# Altium PCB FIT_PM_Dual_Range_AFE.PcbDoc (part 3 of 17)
Units mm, origin at the board's own origin, x right, y up, seen from the top; angles counter-clockwise.
Board outline 259 x 114 mm, 8 copper layers (Top Layer, Mid-Layer 1, Mid-Layer 2, Layer 1, Layer 2, Mid-Layer 3, Mid-Layer 4, Bottom Layer), stack 1.616 mm thick; 963 components, 806 nets, 4757 pads, 2208 vias.
Unrouted connection lines stored in the file: 682.
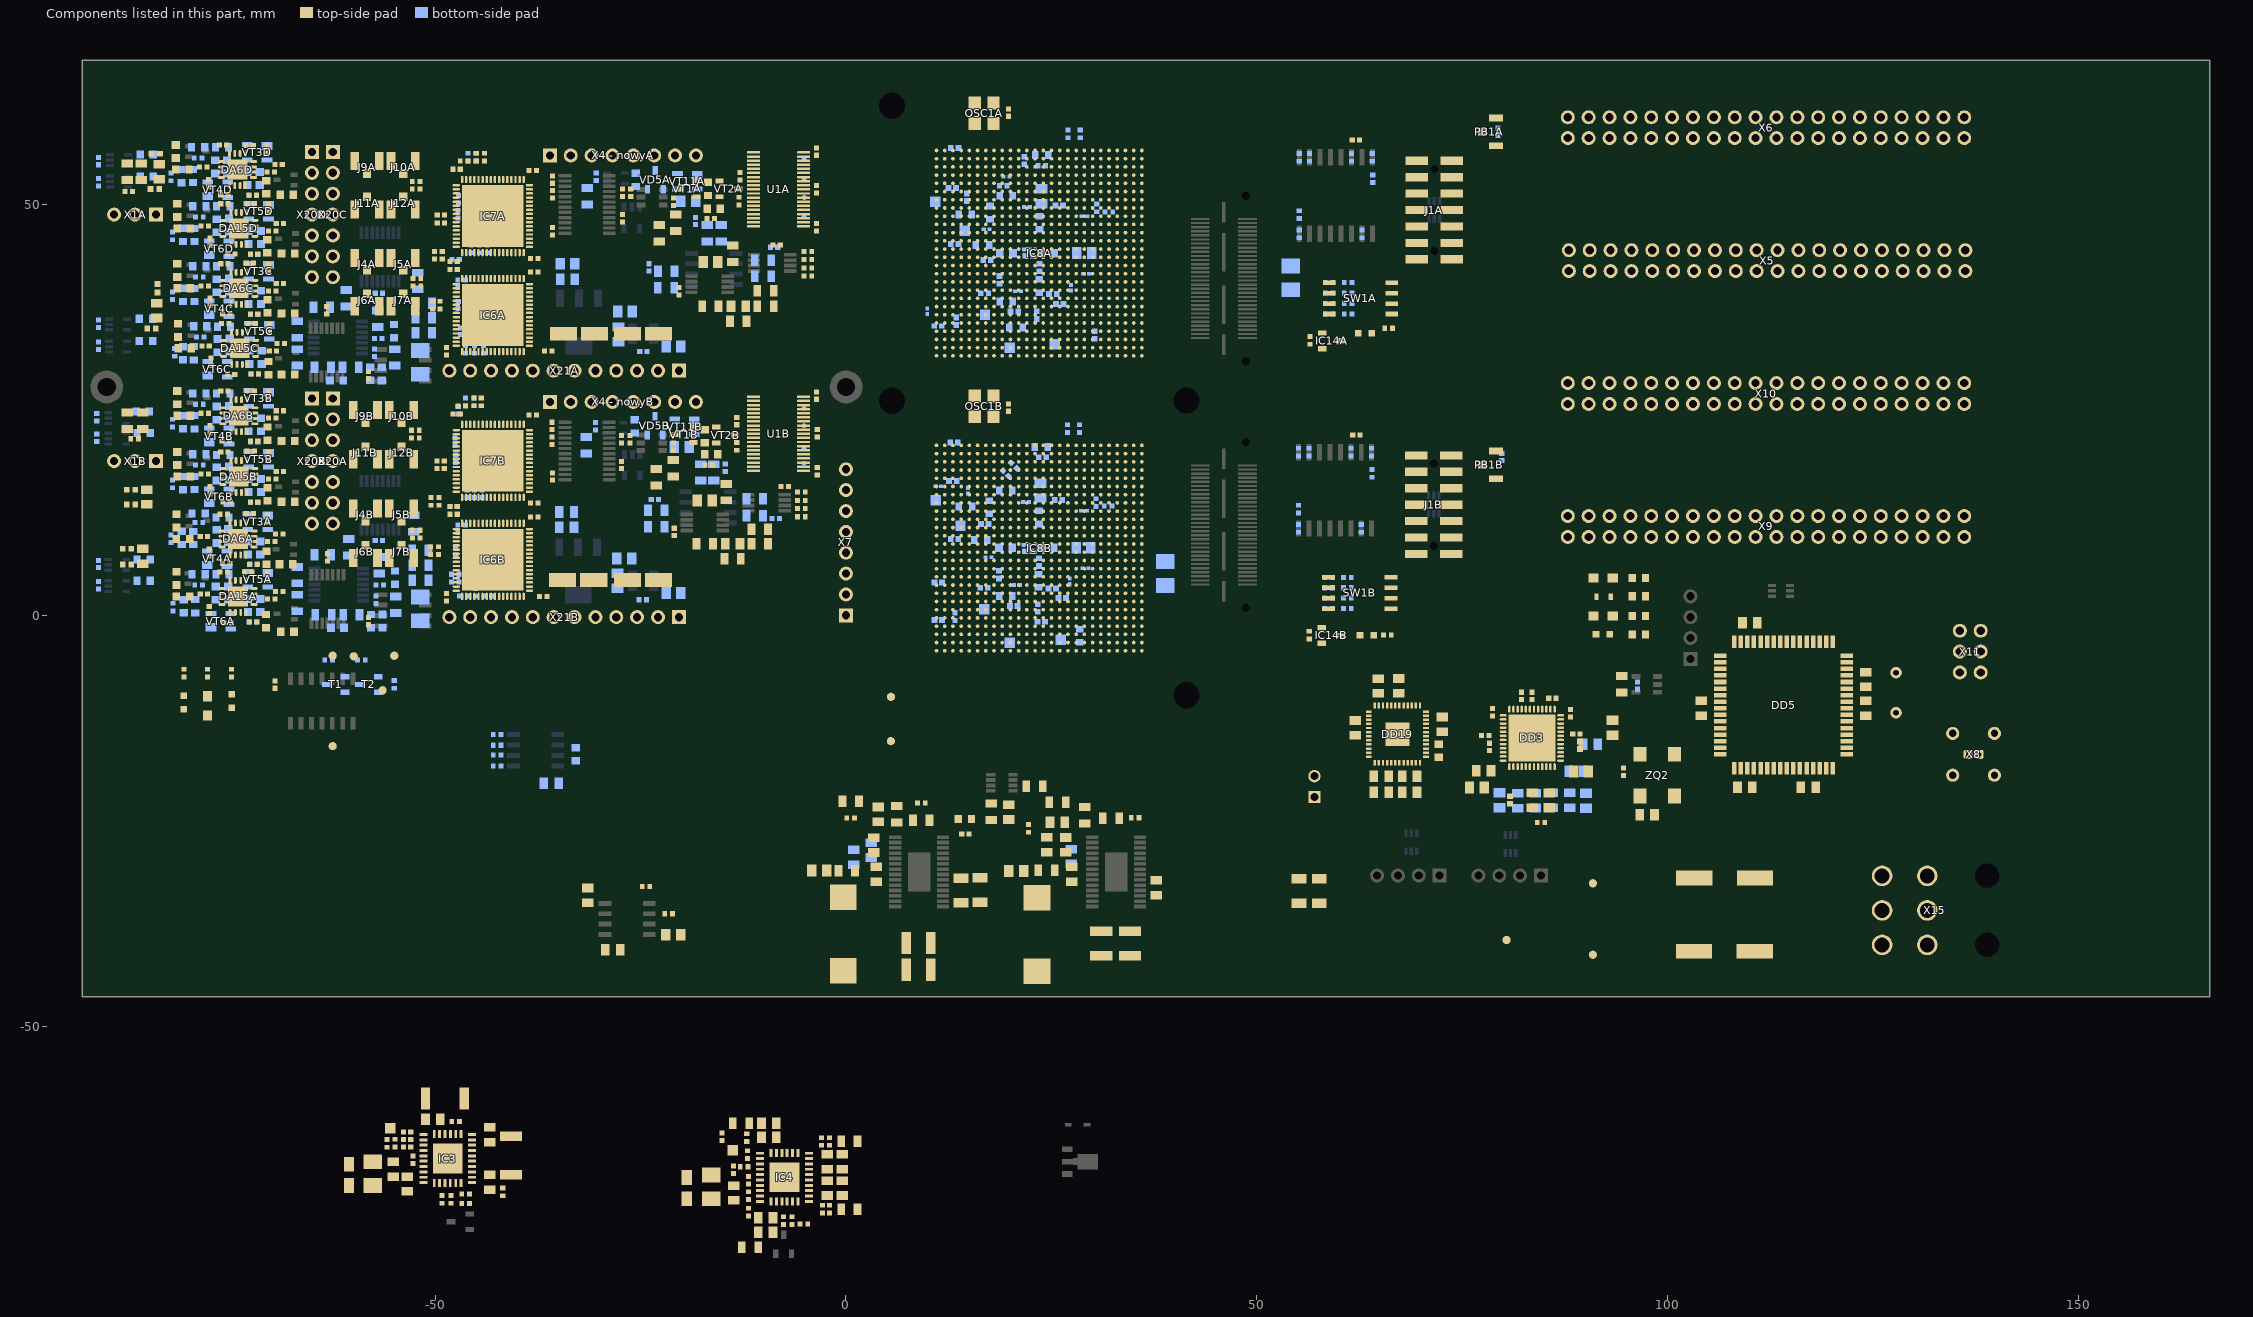
[diagram p7: the components of this part, seen from the top]

## Components (designator, comment, footprint, x,y, rotation, side; value= is the part's Value field where it differs from the comment) (continued)
R235A "Undefined" RESC1005X40N -82.15,9.325 r270 bottom (schematic designator R235)
R235B "Undefined" RESC1005X40N -82,23.4 r270 bottom (schematic designator R235)
R235C "Undefined" RESC1005X40N -82,38.9 r270 bottom (schematic designator R235)
R235D "Undefined" RESC1005X40N -82.168,53.368 r270 bottom (schematic designator R235)
R236A "210" RESC1608X55N -80.85,9.425 r270 bottom (schematic designator R236)
R236B "210" RESC1608X55N -80.7,23.5 r270 bottom (schematic designator R236)
R236C "210" RESC1608X55N -80.7,39 r270 bottom (schematic designator R236)
R236D "210" RESC1608X55N -80.868,53.468 r270 bottom (schematic designator R236)
R237A "210" RESC1608X55N -78.8,5 r0 bottom (schematic designator R237)
R237B "210" RESC1608X55N -78.7,19.6 r0 bottom (schematic designator R237)
R237C "210" RESC1608X55N -78.6,35.2 r0 bottom (schematic designator R237)
R237D "210" RESC1608X55N -78.7,49.8 r0 bottom (schematic designator R237)
R238A "Undefined" RESC1005X40N -78.8,3.7 r0 bottom (schematic designator R238)
R238B "Undefined" RESC1005X40N -78.7,18.3 r0 bottom (schematic designator R238)
R238C "Undefined" RESC1005X40N -78.6,33.9 r0 bottom (schematic designator R238)
R238D "Undefined" RESC1005X40N -78.7,48.5 r0 bottom (schematic designator R238)
R239A "210" RESC1608X55N -80.6,1.1 r270 bottom (schematic designator R239)
R239B "210" RESC1608X55N -80.7,16.1 r270 bottom (schematic designator R239)
R239C "210" RESC1608X55N -80.7,31.9 r270 bottom (schematic designator R239)
R239D "210" RESC1608X55N -80.7,46.3 r270 bottom (schematic designator R239)
R240A "Undefined" RESC1005X40N -81.9,1 r270 bottom (schematic designator R240)
R240B "Undefined" RESC1005X40N -82,16 r270 bottom (schematic designator R240)
R240C "Undefined" RESC1005X40N -81.7,32 r270 bottom (schematic designator R240)
R240D "Undefined" RESC1005X40N -82,46.2 r270 bottom (schematic designator R240)
R245A "100" RESC1608X55N -57.9,29.4 r270 bottom (schematic designator R245)
R245B "100" RESC1608X55N -57.8,-0.7 r270 bottom (schematic designator R245)
R246A "5R1" RESC2012X60N -60.3,30.2 r180 bottom (schematic designator R246)
R246B "5R1" RESC2012X60N -60.2,0.1 r180 bottom (schematic designator R246)
R247A "300" RESC2012X60N -54.9,31.4 r270 bottom (schematic designator R247)
R247B "300" RESC2012X60N -54.8,1.3 r270 bottom (schematic designator R247)
R248A "3k" RESC1608X55N -55,34.6 r270 bottom (schematic designator R248)
R248B "3k" RESC1608X55N -54.9,4.6 r270 bottom (schematic designator R248)
R300A "100" RES_VISHAY_FCHP0402 -87.52,6.2 r180 top (schematic designator R300)
R300B "100" RES_VISHAY_FCHP0402 -87.02,15.3 r180 top (schematic designator R300)
R300C "100" RES_VISHAY_FCHP0402 -83.8,39.82 r90 top (schematic designator R300)
R300D "100" RES_VISHAY_FCHP0402 -84.02,56.2 r180 top (schematic designator R300)
R400A "100" RES_VISHAY_FCHP0402 -87.52,8.1 r180 top (schematic designator R400)
R400B "100" RES_VISHAY_FCHP0402 -87.02,13.5 r180 top (schematic designator R400)
R400C "100" RES_VISHAY_FCHP0402 -84.52,34.9 r180 top (schematic designator R400)
R400D "100" RES_VISHAY_FCHP0402 -84.12,51.9 r180 top (schematic designator R400)
SW1A "Switch" SW_TYCO_1571983-4 62.619,38.586 r180 top (schematic designator SW1)
SW1B "Switch" SW_TYCO_1571983-4 62.544,2.722 r180 top (schematic designator SW1)
T1 "BSS138LT1G" SOT95P240X110-3N -62.131,-8.414 r180 bottom
T2 "BSS138LT1G" SOT95P240X110-3N -58.093,-8.414 r180 bottom
TP1 "Test Point" TPS127 -55.481,-62.414 r180 top
TP2A "Test Point" TPS127 10.891,50.356 r90 bottom (schematic designator TP2)
TP2B "Test Point" TPS127 10.919,13.995 r90 bottom (schematic designator TP2)
TP3A "Test Point" TPS127 14.447,46.825 r90 bottom (schematic designator TP3)
TP3B "Test Point" TPS127 13.942,10.922 r90 bottom (schematic designator TP3)
TP4A "Test Point" TPS127 16.919,36.586 r90 bottom (schematic designator TP4)
TP4B "Test Point" TPS127 16.844,0.722 r90 bottom (schematic designator TP4)
TP5A "Test Point" TPS127 19.919,32.586 r90 bottom (schematic designator TP5)
TP5B "Test Point" TPS127 19.919,-3.314 r90 bottom (schematic designator TP5)
TP6A "Test Point" TPS127 25.419,32.986 r90 bottom (schematic designator TP6)
TP6B "Test Point" TPS127 26.119,-2.997 r90 bottom (schematic designator TP6)
TP7A "SMD Pad" C60 -5.086,55.506 r0 bottom (schematic designator TP7)
TP7B "SMD Pad" C60 -5.1,25.2 r0 bottom (schematic designator TP7)
TP8 "Test Point" TPS127 -13.781,-65.114 r180 top
TP9A "SMD Pad" C60 -5.086,53.186 r0 bottom (schematic designator TP9)
TP9B "SMD Pad" C60 -5.1,23.091 r0 bottom (schematic designator TP9)
TP10A "SMD Pad" C60 -5.086,50.866 r0 bottom (schematic designator TP10)
TP10B "SMD Pad" C60 -5.1,20.3 r0 bottom (schematic designator TP10)
TP11A "SMD Pad" C60 -5.086,48.546 r0 bottom (schematic designator TP11)
TP11B "SMD Pad" C60 -5.1,18.5 r0 bottom (schematic designator TP11)
U1A "SN65LVDS250DBTR" DBT0038A_M -8.2,51.846 r0 top (schematic designator U1)
U1B "SN65LVDS250DBTR" DBT0038A_M -8.2,22.1 r0 top (schematic designator U1)
VD4 "Red" LED_KINGBRIGHT_KPT-2012SURCK -77.694,-11.025 r270 top
VD5A "BAS70LT1G" SOT95P240X110-3N -23.2,53 r90 bottom (schematic designator VD5)
VD5B "BAS70LT1G" SOT95P240X110-3N -23.25,23.1 r90 bottom (schematic designator VD5)
VD8 "Red" LED_KINGBRIGHT_KPT-2012SURCK 92.169,4.536 r180 top
VD13 "Red" LED_KINGBRIGHT_KPT-2012SURCK 92.169,-0.081 r180 top
VT1A "BF550" SOT95P230X110-3N -19.35,51.9 r180 top (schematic designator VT1)
VT1B "BF550" SOT95P230X110-3N -19.7,22 r180 top (schematic designator VT1)
VT2A "BF550" SOT95P230X110-3N -14.25,51.9 r0 top (schematic designator VT2)
VT2B "BF550" SOT95P230X110-3N -14.65,21.95 r0 top (schematic designator VT2)
VT3A "SST210-SOT-143-4L-CT" SOT143N -71.6,11.4 r180 bottom (schematic designator VT3)
VT3B "SST210-SOT-143-4L-CT" SOT143N -71.5,26.4 r180 bottom (schematic designator VT3)
VT3C "SST210-SOT-143-4L-CT" SOT143N -71.5,41.9 r180 bottom (schematic designator VT3)
VT3D "SST210-SOT-143-4L-CT" SOT143N -71.668,56.368 r180 bottom (schematic designator VT3)
VT4A "SST210-SOT-143-4L-CT" SOT143N -76.55,6.875 r0 bottom (schematic designator VT4)
VT4B "SST210-SOT-143-4L-CT" SOT143N -76.3,21.829 r0 bottom (schematic designator VT4)
VT4C "SST210-SOT-143-4L-CT" SOT143N -76.3,37.329 r0 bottom (schematic designator VT4)
VT4D "SST210-SOT-143-4L-CT" SOT143N -76.468,51.796 r0 bottom (schematic designator VT4)
VT5A "SST210-SOT-143-4L-CT" SOT143N -71.6,4.4 r180 bottom (schematic designator VT5)
VT5B "SST210-SOT-143-4L-CT" SOT143N -71.5,19 r180 bottom (schematic designator VT5)
VT5C "SST210-SOT-143-4L-CT" SOT143N -71.4,34.6 r180 bottom (schematic designator VT5)
VT5D "SST210-SOT-143-4L-CT" SOT143N -71.5,49.2 r180 bottom (schematic designator VT5)
VT6A "SST210-SOT-143-4L-CT" SOT143N -76.1,-0.7 r0 bottom (schematic designator VT6)
VT6B "SST210-SOT-143-4L-CT" SOT143N -76.3,14.429 r0 bottom (schematic designator VT6)
VT6C "SST210-SOT-143-4L-CT" SOT143N -76.5,29.95 r0 bottom (schematic designator VT6)
VT6D "SST210-SOT-143-4L-CT" SOT143N -76.3,44.629 r0 bottom (schematic designator VT6)
VT11A "SST211" SOT143N -19.3,52.85 r180 bottom (schematic designator VT11)
VT11B "SST211" SOT143N -19.65,22.95 r180 bottom (schematic designator VT11)
X1A "Header 3" SAMTEC_DW-03-09-L-S-470 -86.54,48.78 r180 top locked
X1B "Header 3" SAMTEC_DW-03-09-L-S-470 -86.54,18.78 r180 top locked
"X4 - nowyA" "Header 8" SAMTEC_DW-08-09-L-S-470 -27.15,55.98 r0 top locked (schematic designator "X4 - nowy")
"X4 - nowyB" "Header 8" SAMTEC_DW-08-09-L-S-470 -27.15,25.98 r0 top locked (schematic designator "X4 - nowy")
X5 "" CONNFLY_DS1013-40SSIB1-B-0 112.119,43.176 r180 top locked
X6 "" CONNFLY_DS1013-40SSIB1-B-0 111.989,59.356 r180 top locked
X7 "Header 8" SAMTEC_DW-08-09-L-S-470 0,8.89 r90 top locked
X8 "LEMO 00" LEMO_EPG.00.302.NLN 137.254,-16.914 r0 top
X9 "" CONNFLY_DS1013-40SSIB1-B-0 111.989,10.816 r180 top locked
X10 "" CONNFLY_DS1013-40SSIB1-B-0 111.989,26.996 r180 top locked
X11 "" CONNFLY_DS1013-06SSIB1-B-0 136.849,-4.414 r90 top
X15 "Mini-Fit BMI" MOLEX_15-24-9067 128.869,-35.914 r270 top
X20A "Header 7" SAMTEC_DW-07-09-L-S-470 -62.46,18.78 r270 top (schematic designator X20)
X20B "Header 7" SAMTEC_DW-07-09-L-S-470 -65,18.78 r270 top (schematic designator X20)
X20C "Header 7" SAMTEC_DW-07-09-L-S-470 -62.46,48.78 r270 top (schematic designator X20)
X20D "Header 7" SAMTEC_DW-07-09-L-S-470 -65,48.78 r270 top (schematic designator X20)
X21A "Header 12" SAMTEC_DW-12-09-L-S-470 -34.31,29.78 r180 top locked (schematic designator X21)
X21B "Header 12" SAMTEC_DW-12-09-L-S-470 -34.31,-0.22 r180 top locked (schematic designator X21)
ZQ1 "16MHz" XTAL_ABRACON_ABL 127.819,-9.414 r90 top
ZQ2 "40MHz" OSC_IQD_CFPS-73 98.768,-19.435 r180 top

## Footprints (in the part's own frame and the unit in brackets; to place one, negate y for a bottom-side part, rotate by r counter-clockwise, add the part's x,y. Pads: shape width x height; smd on the part's side, far side on the other; paste and mask are expansions set on the pad)
BGA676C100P26X26_2700X2700X350#1 [mm] "BGA, 1.00mm Pitch, Square; 676 Pin, 26 Columns X 26 Rows, 27.00mm X 27.00mm X 3.50mm H"
  round 0.45 smd: A1(-12.5,12.5) A2(-11.5,12.5) A3(-10.5,12.5) A4(-9.5,12.5) A5(-8.5,12.5) A6(-7.5,12.5) A7(-6.5,12.5) A8(-5.5,12.5) A9(-4.5,12.5) A10(-3.5,12.5) A11(-2.5,12.5) A12(-1.5,12.5) A13(-0.5,12.5) A14(0.5,12.5) A15(1.5,12.5) A16(2.5,12.5) A17(3.5,12.5) A18(4.5,12.5) A19(5.5,12.5) A20(6.5,12.5) A21(7.5,12.5) A22(8.5,12.5) A23(9.5,12.5) A24(10.5,12.5) A25(11.5,12.5) A26(12.5,12.5) AA1(-12.5,-7.5) AA2(-11.5,-7.5) AA3(-10.5,-7.5) AA4(-9.5,-7.5) AA5(-8.5,-7.5) AA6(-7.5,-7.5) AA7(-6.5,-7.5) AA8(-5.5,-7.5) AA9(-4.5,-7.5) AA10(-3.5,-7.5) AA11(-2.5,-7.5) AA12(-1.5,-7.5) AA13(-0.5,-7.5) AA14(0.5,-7.5) AA15(1.5,-7.5) AA16(2.5,-7.5) AA17(3.5,-7.5) AA18(4.5,-7.5) AA19(5.5,-7.5) AA20(6.5,-7.5) AA21(7.5,-7.5) AA22(8.5,-7.5) AA23(9.5,-7.5) AA24(10.5,-7.5) AA25(11.5,-7.5) AB1(-12.5,-8.5) AB2(-11.5,-8.5) AB3(-10.5,-8.5) AB4(-9.5,-8.5) AB5(-8.5,-8.5) AB6(-7.5,-8.5) AB7(-6.5,-8.5) AB8(-5.5,-8.5) AB9(-4.5,-8.5) AB10(-3.5,-8.5) AB11(-2.5,-8.5) AB12(-1.5,-8.5) AB13(-0.5,-8.5) AB14(0.5,-8.5) AB15(1.5,-8.5) AB16(2.5,-8.5) AB17(3.5,-8.5) AB18(4.5,-8.5) AB19(5.5,-8.5) AB20(6.5,-8.5) AB21(7.5,-8.5) AB22(8.5,-8.5) AB23(9.5,-8.5) AB24(10.5,-8.5) AB25(11.5,-8.5) AC1(-12.5,-9.5) AC2(-11.5,-9.5) AC3(-10.5,-9.5) AC4(-9.5,-9.5) AC5(-8.5,-9.5) AC6(-7.5,-9.5) AC7(-6.5,-9.5) AC8(-5.5,-9.5) AC9(-4.5,-9.5) AC10(-3.5,-9.5) AC11(-2.5,-9.5) AC12(-1.5,-9.5) AC13(-0.5,-9.5) AC14(0.5,-9.5) AC15(1.5,-9.5) AC16(2.5,-9.5) AC17(3.5,-9.5) AC18(4.5,-9.5) AC19(5.5,-9.5) AC20(6.5,-9.5) AC21(7.5,-9.5) AC22(8.5,-9.5) AC23(9.5,-9.5) AC24(10.5,-9.5) AC25(11.5,-9.5) AC26(12.5,-9.5) AD1(-12.5,-10.5) AD2(-11.5,-10.5) AD3(-10.5,-10.5) AD4(-9.5,-10.5) AD5(-8.5,-10.5) AD6(-7.5,-10.5) AD7(-6.5,-10.5) AD8(-5.5,-10.5) AD9(-4.5,-10.5) AD10(-3.5,-10.5) AD11(-2.5,-10.5) AD12(-1.5,-10.5) AD13(-0.5,-10.5) AD14(0.5,-10.5) AD15(1.5,-10.5) AD16(2.5,-10.5) AD17(3.5,-10.5) AD18(4.5,-10.5) AD19(5.5,-10.5) AD20(6.5,-10.5) AD21(7.5,-10.5) AD22(8.5,-10.5) AD23(9.5,-10.5) AD24(10.5,-10.5) AD25(11.5,-10.5) AD26(12.5,-10.5) AE1(-12.5,-11.5) AE2(-11.5,-11.5) AE3(-10.5,-11.5) AE4(-9.5,-11.5) AE5(-8.5,-11.5) AE6(-7.5,-11.5) AE7(-6.5,-11.5) AE8(-5.5,-11.5) AE9(-4.5,-11.5) AE10(-3.5,-11.5) AE11(-2.5,-11.5) AE12(-1.5,-11.5) AE13(-0.5,-11.5) AE14(0.5,-11.5) AE15(1.5,-11.5) AE16(2.5,-11.5) AE17(3.5,-11.5) AE18(4.5,-11.5) AE19(5.5,-11.5) AE20(6.5,-11.5) AE21(7.5,-11.5) AE22(8.5,-11.5) AE23(9.5,-11.5) AE24(10.5,-11.5) AE25(11.5,-11.5) AE26(12.5,-11.5) AF1(-12.5,-12.5) AF2(-11.5,-12.5) AF3(-10.5,-12.5) AF4(-9.5,-12.5) AF5(-8.5,-12.5) AF6(-7.5,-12.5) AF7(-6.5,-12.5) AF8(-5.5,-12.5) AF9(-4.5,-12.5) AF10(-3.5,-12.5) AF11(-2.5,-12.5) AF12(-1.5,-12.5) AF13(-0.5,-12.5) AF14(0.5,-12.5) AF15(1.5,-12.5) AF16(2.5,-12.5) AF17(3.5,-12.5) AF18(4.5,-12.5) AF19(5.5,-12.5) AF20(6.5,-12.5) AF21(7.5,-12.5) AF22(8.5,-12.5) AF23(9.5,-12.5) AF24(10.5,-12.5) AF25(11.5,-12.5) AF26(12.5,-12.5) B1(-12.5,11.5) B2(-11.5,11.5) B3(-10.5,11.5) B4(-9.5,11.5) B5(-8.5,11.5) B6(-7.5,11.5) B7(-6.5,11.5) B8(-5.5,11.5) B9(-4.5,11.5) B10(-3.5,11.5) B11(-2.5,11.5) B12(-1.5,11.5) B13(-0.5,11.5) B14(0.5,11.5) B15(1.5,11.5) B16(2.5,11.5) B17(3.5,11.5) B18(4.5,11.5) B19(5.5,11.5) B20(6.5,11.5) B21(7.5,11.5) B22(8.5,11.5) B23(9.5,11.5) B24(10.5,11.5) B25(11.5,11.5) B26(12.5,11.5) C1(-12.5,10.5) C2(-11.5,10.5) C3(-10.5,10.5) C4(-9.5,10.5) C5(-8.5,10.5) C6(-7.5,10.5) C7(-6.5,10.5) C8(-5.5,10.5) C9(-4.5,10.5) C10(-3.5,10.5) C11(-2.5,10.5) C12(-1.5,10.5) C13(-0.5,10.5) C14(0.5,10.5) C15(1.5,10.5) C16(2.5,10.5) C17(3.5,10.5) C18(4.5,10.5) C19(5.5,10.5) C20(6.5,10.5) C21(7.5,10.5) C22(8.5,10.5) C23(9.5,10.5) C24(10.5,10.5) C25(11.5,10.5) C26(12.5,10.5) D1(-12.5,9.5) D2(-11.5,9.5) D3(-10.5,9.5) D4(-9.5,9.5) D5(-8.5,9.5) D6(-7.5,9.5) D7(-6.5,9.5) D8(-5.5,9.5) D9(-4.5,9.5) D10(-3.5,9.5) D11(-2.5,9.5) D12(-1.5,9.5) D13(-0.5,9.5) D14(0.5,9.5) D15(1.5,9.5) D16(2.5,9.5) D17(3.5,9.5) D18(4.5,9.5) D19(5.5,9.5) D20(6.5,9.5) D21(7.5,9.5) D22(8.5,9.5) D23(9.5,9.5) D24(10.5,9.5) D25(11.5,9.5) D26(12.5,9.5) E1(-12.5,8.5) E2(-11.5,8.5) E3(-10.5,8.5) E4(-9.5,8.5) E5(-8.5,8.5) E6(-7.5,8.5) E7(-6.5,8.5) E8(-5.5,8.5) E9(-4.5,8.5) E10(-3.5,8.5) E11(-2.5,8.5) E12(-1.5,8.5) E13(-0.5,8.5) E14(0.5,8.5) E15(1.5,8.5) E16(2.5,8.5) E17(3.5,8.5) E18(4.5,8.5) E19(5.5,8.5) E20(6.5,8.5) E21(7.5,8.5) E22(8.5,8.5) E23(9.5,8.5) E24(10.5,8.5) E25(11.5,8.5) E26(12.5,8.5) F1(-12.5,7.5) F2(-11.5,7.5) F3(-10.5,7.5) F4(-9.5,7.5) F5(-8.5,7.5) F6(-7.5,7.5) F7(-6.5,7.5) F8(-5.5,7.5) F9(-4.5,7.5) F10(-3.5,7.5) F11(-2.5,7.5) F12(-1.5,7.5) F13(-0.5,7.5) F14(0.5,7.5) F15(1.5,7.5) F16(2.5,7.5) F17(3.5,7.5) F18(4.5,7.5) F19(5.5,7.5) F20(6.5,7.5) F21(7.5,7.5) F22(8.5,7.5) F23(9.5,7.5) F24(10.5,7.5) F25(11.5,7.5) F26(12.5,7.5) G1(-12.5,6.5) G2(-11.5,6.5) G3(-10.5,6.5) G4(-9.5,6.5) G5(-8.5,6.5) G6(-7.5,6.5) G7(-6.5,6.5) G8(-5.5,6.5) G9(-4.5,6.5) G10(-3.5,6.5) G11(-2.5,6.5) G12(-1.5,6.5) G13(-0.5,6.5) G14(0.5,6.5) G15(1.5,6.5) G16(2.5,6.5) G17(3.5,6.5) G18(4.5,6.5) G19(5.5,6.5) G20(6.5,6.5) G21(7.5,6.5) G22(8.5,6.5) G23(9.5,6.5) G24(10.5,6.5) G25(11.5,6.5) G26(12.5,6.5) H1(-12.5,5.5) H2(-11.5,5.5) H3(-10.5,5.5) H4(-9.5,5.5) H5(-8.5,5.5) H6(-7.5,5.5) H7(-6.5,5.5) H8(-5.5,5.5) H9(-4.5,5.5) H10(-3.5,5.5) H11(-2.5,5.5) H12(-1.5,5.5) H13(-0.5,5.5) H14(0.5,5.5) H15(1.5,5.5) H16(2.5,5.5) H17(3.5,5.5) H18(4.5,5.5) H19(5.5,5.5) H20(6.5,5.5) H21(7.5,5.5) H22(8.5,5.5) H23(9.5,5.5) H24(10.5,5.5) H25(11.5,5.5) H26(12.5,5.5) J1(-12.5,4.5) J2(-11.5,4.5) J3(-10.5,4.5) J4(-9.5,4.5) J5(-8.5,4.5) J6(-7.5,4.5) J7(-6.5,4.5) J8(-5.5,4.5) J9(-4.5,4.5) J10(-3.5,4.5) J11(-2.5,4.5) J12(-1.5,4.5) J13(-0.5,4.5) J14(0.5,4.5) J15(1.5,4.5) J16(2.5,4.5) J17(3.5,4.5) J18(4.5,4.5) J19(5.5,4.5) J20(6.5,4.5) J21(7.5,4.5) J22(8.5,4.5) J23(9.5,4.5) J24(10.5,4.5) J25(11.5,4.5) J26(12.5,4.5) K1(-12.5,3.5) K2(-11.5,3.5) K3(-10.5,3.5) K4(-9.5,3.5) K5(-8.5,3.5) K6(-7.5,3.5) K7(-6.5,3.5) K8(-5.5,3.5) K9(-4.5,3.5) K10(-3.5,3.5) K11(-2.5,3.5) K12(-1.5,3.5) K13(-0.5,3.5) K14(0.5,3.5) K15(1.5,3.5) K16(2.5,3.5) K17(3.5,3.5) K18(4.5,3.5) K19(5.5,3.5) K20(6.5,3.5) K21(7.5,3.5) K22(8.5,3.5) K23(9.5,3.5) K24(10.5,3.5) K25(11.5,3.5) K26(12.5,3.5) L1(-12.5,2.5) L2(-11.5,2.5) L3(-10.5,2.5) L4(-9.5,2.5) L5(-8.5,2.5) L6(-7.5,2.5) L7(-6.5,2.5) L8(-5.5,2.5) L9(-4.5,2.5) L10(-3.5,2.5) L11(-2.5,2.5) L12(-1.5,2.5) L13(-0.5,2.5) L14(0.5,2.5) L15(1.5,2.5) L16(2.5,2.5) L17(3.5,2.5) L18(4.5,2.5) L19(5.5,2.5) L20(6.5,2.5) L21(7.5,2.5) L22(8.5,2.5) L23(9.5,2.5) L24(10.5,2.5) L25(11.5,2.5) L26(12.5,2.5) M1(-12.5,1.5) M2(-11.5,1.5) M3(-10.5,1.5) M4(-9.5,1.5) M5(-8.5,1.5) M6(-7.5,1.5) M7(-6.5,1.5) M8(-5.5,1.5) M9(-4.5,1.5) M10(-3.5,1.5) M11(-2.5,1.5) M12(-1.5,1.5) M13(-0.5,1.5) M14(0.5,1.5) M15(1.5,1.5) M16(2.5,1.5) M17(3.5,1.5) M18(4.5,1.5) M19(5.5,1.5) M20(6.5,1.5) M21(7.5,1.5) M22(8.5,1.5) M23(9.5,1.5) M24(10.5,1.5) M25(11.5,1.5) M26(12.5,1.5) N1(-12.5,0.5) N2(-11.5,0.5) N3(-10.5,0.5) N4(-9.5,0.5) N5(-8.5,0.5) N6(-7.5,0.5) N7(-6.5,0.5) N8(-5.5,0.5) N9(-4.5,0.5) N10(-3.5,0.5) N11(-2.5,0.5) N12(-1.5,0.5) N13(-0.5,0.5) N14(0.5,0.5) N15(1.5,0.5) N16(2.5,0.5) N17(3.5,0.5) N18(4.5,0.5) N19(5.5,0.5) N20(6.5,0.5) N21(7.5,0.5) N22(8.5,0.5) N23(9.5,0.5) N24(10.5,0.5) N25(11.5,0.5) N26(12.5,0.5) P1(-12.5,-0.5) P2(-11.5,-0.5) P3(-10.5,-0.5) P4(-9.5,-0.5) P5(-8.5,-0.5) P6(-7.5,-0.5) P7(-6.5,-0.5) P8(-5.5,-0.5) P9(-4.5,-0.5) P10(-3.5,-0.5) P11(-2.5,-0.5) P12(-1.5,-0.5) P13(-0.5,-0.5) P14(0.5,-0.5) P15(1.5,-0.5) P16(2.5,-0.5) P17(3.5,-0.5) P18(4.5,-0.5) P19(5.5,-0.5) P20(6.5,-0.5) P21(7.5,-0.5) P22(8.5,-0.5) P23(9.5,-0.5) P24(10.5,-0.5) P25(11.5,-0.5) P26(12.5,-0.5) R1(-12.5,-1.5) R2(-11.5,-1.5) R3(-10.5,-1.5) R4(-9.5,-1.5) R5(-8.5,-1.5) R6(-7.5,-1.5) R7(-6.5,-1.5) R8(-5.5,-1.5) R9(-4.5,-1.5) R10(-3.5,-1.5) R11(-2.5,-1.5) R12(-1.5,-1.5) R13(-0.5,-1.5) R14(0.5,-1.5) R15(1.5,-1.5) R16(2.5,-1.5) R17(3.5,-1.5) R18(4.5,-1.5) R19(5.5,-1.5) R20(6.5,-1.5) R21(7.5,-1.5) R22(8.5,-1.5) R23(9.5,-1.5) R24(10.5,-1.5) R25(11.5,-1.5) R26(12.5,-1.5) T1(-12.5,-2.5) T2(-11.5,-2.5) T3(-10.5,-2.5) T4(-9.5,-2.5) T5(-8.5,-2.5) T6(-7.5,-2.5) T7(-6.5,-2.5) T8(-5.5,-2.5) T9(-4.5,-2.5) T10(-3.5,-2.5) T11(-2.5,-2.5) T12(-1.5,-2.5) T13(-0.5,-2.5) T14(0.5,-2.5) T15(1.5,-2.5) T16(2.5,-2.5) T17(3.5,-2.5) T18(4.5,-2.5) T19(5.5,-2.5) T20(6.5,-2.5) T21(7.5,-2.5) T22(8.5,-2.5) T23(9.5,-2.5) T24(10.5,-2.5) T25(11.5,-2.5) T26(12.5,-2.5) U1(-12.5,-3.5) U2(-11.5,-3.5) U3(-10.5,-3.5) U4(-9.5,-3.5) U5(-8.5,-3.5) U6(-7.5,-3.5) U7(-6.5,-3.5) U8(-5.5,-3.5) U9(-4.5,-3.5) U10(-3.5,-3.5) U11(-2.5,-3.5) U12(-1.5,-3.5) U13(-0.5,-3.5) U14(0.5,-3.5) U15(1.5,-3.5) U16(2.5,-3.5) U17(3.5,-3.5) U18(4.5,-3.5) U19(5.5,-3.5) U20(6.5,-3.5) U21(7.5,-3.5) U22(8.5,-3.5) U23(9.5,-3.5) U24(10.5,-3.5) U25(11.5,-3.5) U26(12.5,-3.5) V1(-12.5,-4.5) V2(-11.5,-4.5) V3(-10.5,-4.5) V4(-9.5,-4.5) V5(-8.5,-4.5) V6(-7.5,-4.5) V7(-6.5,-4.5) V8(-5.5,-4.5) V9(-4.5,-4.5) V10(-3.5,-4.5) V11(-2.5,-4.5) V12(-1.5,-4.5) V13(-0.5,-4.5) V14(0.5,-4.5) V15(1.5,-4.5) V16(2.5,-4.5) V17(3.5,-4.5) V18(4.5,-4.5) V19(5.5,-4.5) V20(6.5,-4.5) V21(7.5,-4.5) V22(8.5,-4.5) V23(9.5,-4.5) V24(10.5,-4.5) V25(11.5,-4.5) V26(12.5,-4.5) W1(-12.5,-5.5) W2(-11.5,-5.5) W3(-10.5,-5.5) W4(-9.5,-5.5) W5(-8.5,-5.5) W6(-7.5,-5.5) W7(-6.5,-5.5) W8(-5.5,-5.5) W9(-4.5,-5.5) W10(-3.5,-5.5) W11(-2.5,-5.5) W12(-1.5,-5.5) W13(-0.5,-5.5) W14(0.5,-5.5) W15(1.5,-5.5) W16(2.5,-5.5) W17(3.5,-5.5) W18(4.5,-5.5) W19(5.5,-5.5) W20(6.5,-5.5) W21(7.5,-5.5) W22(8.5,-5.5) W23(9.5,-5.5) W24(10.5,-5.5) W25(11.5,-5.5) W26(12.5,-5.5) Y1(-12.5,-6.5) Y2(-11.5,-6.5) Y3(-10.5,-6.5) Y4(-9.5,-6.5) Y5(-8.5,-6.5) Y6(-7.5,-6.5) Y7(-6.5,-6.5) Y8(-5.5,-6.5) Y9(-4.5,-6.5) Y10(-3.5,-6.5) Y11(-2.5,-6.5) Y12(-1.5,-6.5) Y13(-0.5,-6.5) Y14(0.5,-6.5) Y15(1.5,-6.5) Y16(2.5,-6.5) Y17(3.5,-6.5) Y18(4.5,-6.5) Y19(5.5,-6.5) Y20(6.5,-6.5) Y21(7.5,-6.5) Y22(8.5,-6.5) Y23(9.5,-6.5) Y24(10.5,-6.5) Y25(11.5,-6.5) Y26(12.5,-6.5)
  oval 0.45x0.4 smd: AA26(12.5,-7.5) AB26(12.5,-8.5)
  silkscreen extent -14.23,-13.5 13.5,13.5, body extent -13.5,-13.5 13.5,13.5, height 3.5
BGA676C100P26X26_2700X2700X350#2 [mm] "BGA, 1.00mm Pitch, Square; 676 Pin, 26 Columns X 26 Rows, 27.00mm X 27.00mm X 3.50mm H"
  round 0.45 smd: A1(-12.5,12.5) A2(-11.5,12.5) A3(-10.5,12.5) A4(-9.5,12.5) A5(-8.5,12.5) A6(-7.5,12.5) A7(-6.5,12.5) A8(-5.5,12.5) A9(-4.5,12.5) A10(-3.5,12.5) A11(-2.5,12.5) A12(-1.5,12.5) A13(-0.5,12.5) A14(0.5,12.5) A15(1.5,12.5) A16(2.5,12.5) A17(3.5,12.5) A18(4.5,12.5) A19(5.5,12.5) A20(6.5,12.5) A21(7.5,12.5) A22(8.5,12.5) A23(9.5,12.5) A24(10.5,12.5) A25(11.5,12.5) A26(12.5,12.5) AA1(-12.5,-7.5) AA2(-11.5,-7.5) AA3(-10.5,-7.5) AA4(-9.5,-7.5) AA5(-8.5,-7.5) AA6(-7.5,-7.5) AA7(-6.5,-7.5) AA8(-5.5,-7.5) AA9(-4.5,-7.5) AA10(-3.5,-7.5) AA11(-2.5,-7.5) AA12(-1.5,-7.5) AA13(-0.5,-7.5) AA14(0.5,-7.5) AA15(1.5,-7.5) AA16(2.5,-7.5) AA17(3.5,-7.5) AA18(4.5,-7.5) AA19(5.5,-7.5) AA20(6.5,-7.5) AA21(7.5,-7.5) AA22(8.5,-7.5) AA23(9.5,-7.5) AA24(10.5,-7.5) AA25(11.5,-7.5) AA26(12.5,-7.5) AB1(-12.5,-8.5) AB2(-11.5,-8.5) AB3(-10.5,-8.5) AB4(-9.5,-8.5) AB5(-8.5,-8.5) AB6(-7.5,-8.5) AB7(-6.5,-8.5) AB8(-5.5,-8.5) AB9(-4.5,-8.5) AB10(-3.5,-8.5) AB11(-2.5,-8.5) AB12(-1.5,-8.5) AB13(-0.5,-8.5) AB14(0.5,-8.5) AB15(1.5,-8.5) AB16(2.5,-8.5) AB17(3.5,-8.5) AB18(4.5,-8.5) AB19(5.5,-8.5) AB20(6.5,-8.5) AB21(7.5,-8.5) AB22(8.5,-8.5) AB23(9.5,-8.5) AB24(10.5,-8.5) AB25(11.5,-8.5) AB26(12.5,-8.5) AC1(-12.5,-9.5) AC2(-11.5,-9.5) AC3(-10.5,-9.5) AC4(-9.5,-9.5) AC5(-8.5,-9.5) AC6(-7.5,-9.5) AC7(-6.5,-9.5) AC8(-5.5,-9.5) AC9(-4.5,-9.5) AC10(-3.5,-9.5) AC11(-2.5,-9.5) AC12(-1.5,-9.5) AC13(-0.5,-9.5) AC14(0.5,-9.5) AC15(1.5,-9.5) AC16(2.5,-9.5) AC17(3.5,-9.5) AC18(4.5,-9.5) AC19(5.5,-9.5) AC20(6.5,-9.5) AC21(7.5,-9.5) AC22(8.5,-9.5) AC23(9.5,-9.5) AC24(10.5,-9.5) AC25(11.5,-9.5) AC26(12.5,-9.5) AD1(-12.5,-10.5) AD2(-11.5,-10.5) AD3(-10.5,-10.5) AD4(-9.5,-10.5) AD5(-8.5,-10.5) AD6(-7.5,-10.5) AD7(-6.5,-10.5) AD8(-5.5,-10.5) AD9(-4.5,-10.5) AD10(-3.5,-10.5) AD11(-2.5,-10.5) AD12(-1.5,-10.5) AD13(-0.5,-10.5) AD14(0.5,-10.5) AD15(1.5,-10.5) AD16(2.5,-10.5) AD17(3.5,-10.5) AD18(4.5,-10.5) AD19(5.5,-10.5) AD20(6.5,-10.5) AD21(7.5,-10.5) AD22(8.5,-10.5) AD23(9.5,-10.5) AD24(10.5,-10.5) AD25(11.5,-10.5) AD26(12.5,-10.5) AE1(-12.5,-11.5) AE2(-11.5,-11.5) AE3(-10.5,-11.5) AE4(-9.5,-11.5) AE5(-8.5,-11.5) AE6(-7.5,-11.5) AE7(-6.5,-11.5) AE8(-5.5,-11.5) AE9(-4.5,-11.5) AE10(-3.5,-11.5) AE11(-2.5,-11.5) AE12(-1.5,-11.5) AE13(-0.5,-11.5) AE14(0.5,-11.5) AE15(1.5,-11.5) AE16(2.5,-11.5) AE17(3.5,-11.5) AE18(4.5,-11.5) AE19(5.5,-11.5) AE20(6.5,-11.5) AE21(7.5,-11.5) AE22(8.5,-11.5) AE23(9.5,-11.5) AE24(10.5,-11.5) AE25(11.5,-11.5) AE26(12.5,-11.5) AF1(-12.5,-12.5) AF2(-11.5,-12.5) AF3(-10.5,-12.5) AF4(-9.5,-12.5) AF5(-8.5,-12.5) AF6(-7.5,-12.5) AF7(-6.5,-12.5) AF8(-5.5,-12.5) AF9(-4.5,-12.5) AF10(-3.5,-12.5) AF11(-2.5,-12.5) AF12(-1.5,-12.5) AF13(-0.5,-12.5) AF14(0.5,-12.5) AF15(1.5,-12.5) AF16(2.5,-12.5) AF17(3.5,-12.5) AF18(4.5,-12.5) AF19(5.5,-12.5) AF20(6.5,-12.5) AF21(7.5,-12.5) AF22(8.5,-12.5) AF23(9.5,-12.5) AF24(10.5,-12.5) AF25(11.5,-12.5) AF26(12.5,-12.5) B1(-12.5,11.5) B2(-11.5,11.5) B3(-10.5,11.5) B4(-9.5,11.5) B5(-8.5,11.5) B6(-7.5,11.5) B7(-6.5,11.5) B8(-5.5,11.5) B9(-4.5,11.5) B10(-3.5,11.5) B11(-2.5,11.5) B12(-1.5,11.5) B13(-0.5,11.5) B14(0.5,11.5) B15(1.5,11.5) B16(2.5,11.5) B17(3.5,11.5) B18(4.5,11.5) B19(5.5,11.5) B20(6.5,11.5) B21(7.5,11.5) B22(8.5,11.5) B23(9.5,11.5) B24(10.5,11.5) B25(11.5,11.5) B26(12.5,11.5) C1(-12.5,10.5) C2(-11.5,10.5) C3(-10.5,10.5) C4(-9.5,10.5) C5(-8.5,10.5) C6(-7.5,10.5) C7(-6.5,10.5) C8(-5.5,10.5) C9(-4.5,10.5) C10(-3.5,10.5) C11(-2.5,10.5) C12(-1.5,10.5) C13(-0.5,10.5) C14(0.5,10.5) C15(1.5,10.5) C16(2.5,10.5) C17(3.5,10.5) C18(4.5,10.5) C19(5.5,10.5) C20(6.5,10.5) C21(7.5,10.5) C22(8.5,10.5) C23(9.5,10.5) C24(10.5,10.5) C25(11.5,10.5) C26(12.5,10.5) D1(-12.5,9.5) D2(-11.5,9.5) D3(-10.5,9.5) D4(-9.5,9.5) D5(-8.5,9.5) D6(-7.5,9.5) D7(-6.5,9.5) D8(-5.5,9.5) D9(-4.5,9.5) D10(-3.5,9.5) D11(-2.5,9.5) D12(-1.5,9.5) D13(-0.5,9.5) D14(0.5,9.5) D15(1.5,9.5) D16(2.5,9.5) D17(3.5,9.5) D18(4.5,9.5) D19(5.5,9.5) D20(6.5,9.5) D21(7.5,9.5) D22(8.5,9.5) D23(9.5,9.5) D24(10.5,9.5) D25(11.5,9.5) D26(12.5,9.5) E1(-12.5,8.5) E2(-11.5,8.5) E3(-10.5,8.5) E4(-9.5,8.5) E5(-8.5,8.5) E6(-7.5,8.5) E7(-6.5,8.5) E8(-5.5,8.5) E9(-4.5,8.5) E10(-3.5,8.5) E11(-2.5,8.5) E12(-1.5,8.5) E13(-0.5,8.5) E14(0.5,8.5) E15(1.5,8.5) E16(2.5,8.5) E17(3.5,8.5) E18(4.5,8.5) E19(5.5,8.5) E20(6.5,8.5) E21(7.5,8.5) E22(8.5,8.5) E23(9.5,8.5) E24(10.5,8.5) E25(11.5,8.5) E26(12.5,8.5) F1(-12.5,7.5) F2(-11.5,7.5) F3(-10.5,7.5) F4(-9.5,7.5) F5(-8.5,7.5) F6(-7.5,7.5) F7(-6.5,7.5) F8(-5.5,7.5) F9(-4.5,7.5) F10(-3.5,7.5) F11(-2.5,7.5) F12(-1.5,7.5) F13(-0.5,7.5) F14(0.5,7.5) F15(1.5,7.5) F16(2.5,7.5) F17(3.5,7.5) F18(4.5,7.5) F19(5.5,7.5) F20(6.5,7.5) F21(7.5,7.5) F22(8.5,7.5) F23(9.5,7.5) F24(10.5,7.5) F25(11.5,7.5) F26(12.5,7.5) G1(-12.5,6.5) G2(-11.5,6.5) G3(-10.5,6.5) G4(-9.5,6.5) G5(-8.5,6.5) G6(-7.5,6.5) G7(-6.5,6.5) G8(-5.5,6.5) G9(-4.5,6.5) G10(-3.5,6.5) G11(-2.5,6.5) G12(-1.5,6.5) G13(-0.5,6.5) G14(0.5,6.5) G15(1.5,6.5) G16(2.5,6.5) G17(3.5,6.5) G18(4.5,6.5) G19(5.5,6.5) G20(6.5,6.5) G21(7.5,6.5) G22(8.5,6.5) G23(9.5,6.5) G24(10.5,6.5) G25(11.5,6.5) G26(12.5,6.5) H1(-12.5,5.5) H2(-11.5,5.5) H3(-10.5,5.5) H4(-9.5,5.5) H5(-8.5,5.5) H6(-7.5,5.5) H7(-6.5,5.5) H8(-5.5,5.5) H9(-4.5,5.5) H10(-3.5,5.5) H11(-2.5,5.5) H12(-1.5,5.5) H13(-0.5,5.5) H14(0.5,5.5) H15(1.5,5.5) H16(2.5,5.5) H17(3.5,5.5) H18(4.5,5.5) H19(5.5,5.5) H20(6.5,5.5) H21(7.5,5.5) H22(8.5,5.5) H23(9.5,5.5) H24(10.5,5.5) H25(11.5,5.5) H26(12.5,5.5) J1(-12.5,4.5) J2(-11.5,4.5) J3(-10.5,4.5) J4(-9.5,4.5) J5(-8.5,4.5) J6(-7.5,4.5) J7(-6.5,4.5) J8(-5.5,4.5) J9(-4.5,4.5) J10(-3.5,4.5) J11(-2.5,4.5) J12(-1.5,4.5) J13(-0.5,4.5) J14(0.5,4.5) J15(1.5,4.5) J16(2.5,4.5) J17(3.5,4.5) J18(4.5,4.5) J19(5.5,4.5) J20(6.5,4.5) J21(7.5,4.5) J22(8.5,4.5) J23(9.5,4.5) J24(10.5,4.5) J25(11.5,4.5) J26(12.5,4.5) K1(-12.5,3.5) K2(-11.5,3.5) K3(-10.5,3.5) K4(-9.5,3.5) K5(-8.5,3.5) K6(-7.5,3.5) K7(-6.5,3.5) K8(-5.5,3.5) K9(-4.5,3.5) K10(-3.5,3.5) K11(-2.5,3.5) K12(-1.5,3.5) K13(-0.5,3.5) K14(0.5,3.5) K15(1.5,3.5) K16(2.5,3.5) K17(3.5,3.5) K18(4.5,3.5) K19(5.5,3.5) K20(6.5,3.5) K21(7.5,3.5) K22(8.5,3.5) K23(9.5,3.5) K24(10.5,3.5) K25(11.5,3.5) K26(12.5,3.5) L1(-12.5,2.5) L2(-11.5,2.5) L3(-10.5,2.5) L4(-9.5,2.5) L5(-8.5,2.5) L6(-7.5,2.5) L7(-6.5,2.5) L8(-5.5,2.5) L9(-4.5,2.5) L10(-3.5,2.5) L11(-2.5,2.5) L12(-1.5,2.5) L13(-0.5,2.5) L14(0.5,2.5) L15(1.5,2.5) L16(2.5,2.5) L17(3.5,2.5) L18(4.5,2.5) L19(5.5,2.5) L20(6.5,2.5) L21(7.5,2.5) L22(8.5,2.5) L23(9.5,2.5) L24(10.5,2.5) L25(11.5,2.5) L26(12.5,2.5) M1(-12.5,1.5) M2(-11.5,1.5) M3(-10.5,1.5) M4(-9.5,1.5) M5(-8.5,1.5) M6(-7.5,1.5) M7(-6.5,1.5) M8(-5.5,1.5) M9(-4.5,1.5) M10(-3.5,1.5) M11(-2.5,1.5) M12(-1.5,1.5) M13(-0.5,1.5) M14(0.5,1.5) M15(1.5,1.5) M16(2.5,1.5) M17(3.5,1.5) M18(4.5,1.5) M19(5.5,1.5) M20(6.5,1.5) M21(7.5,1.5) M22(8.5,1.5) M23(9.5,1.5) M24(10.5,1.5) M25(11.5,1.5) M26(12.5,1.5) N1(-12.5,0.5) N2(-11.5,0.5) N3(-10.5,0.5) N4(-9.5,0.5) N5(-8.5,0.5) N6(-7.5,0.5) N7(-6.5,0.5) N8(-5.5,0.5) N9(-4.5,0.5) N10(-3.5,0.5) N11(-2.5,0.5) N12(-1.5,0.5) N13(-0.5,0.5) N14(0.5,0.5) N15(1.5,0.5) N16(2.5,0.5) N17(3.5,0.5) N18(4.5,0.5) N19(5.5,0.5) N20(6.5,0.5) N21(7.5,0.5) N22(8.5,0.5) N23(9.5,0.5) N24(10.5,0.5) N25(11.5,0.5) N26(12.5,0.5) P1(-12.5,-0.5) P2(-11.5,-0.5) P3(-10.5,-0.5) P4(-9.5,-0.5) P5(-8.5,-0.5) P6(-7.5,-0.5) P7(-6.5,-0.5) P8(-5.5,-0.5) P9(-4.5,-0.5) P10(-3.5,-0.5) P11(-2.5,-0.5) P12(-1.5,-0.5) P13(-0.5,-0.5) P14(0.5,-0.5) P15(1.5,-0.5) P16(2.5,-0.5) P17(3.5,-0.5) P18(4.5,-0.5) P19(5.5,-0.5) P20(6.5,-0.5) P21(7.5,-0.5) P22(8.5,-0.5) P23(9.5,-0.5) P24(10.5,-0.5) P25(11.5,-0.5) P26(12.5,-0.5) R1(-12.5,-1.5) R2(-11.5,-1.5) R3(-10.5,-1.5) R4(-9.5,-1.5) R5(-8.5,-1.5) R6(-7.5,-1.5) R7(-6.5,-1.5) R8(-5.5,-1.5) R9(-4.5,-1.5) R10(-3.5,-1.5) R11(-2.5,-1.5) R12(-1.5,-1.5) R13(-0.5,-1.5) R14(0.5,-1.5) R15(1.5,-1.5) R16(2.5,-1.5) R17(3.5,-1.5) R18(4.5,-1.5) R19(5.5,-1.5) R20(6.5,-1.5) R21(7.5,-1.5) R22(8.5,-1.5) R23(9.5,-1.5) R24(10.5,-1.5) R25(11.5,-1.5) R26(12.5,-1.5) T1(-12.5,-2.5) T2(-11.5,-2.5) T3(-10.5,-2.5) T4(-9.5,-2.5) T5(-8.5,-2.5) T6(-7.5,-2.5) T7(-6.5,-2.5) T8(-5.5,-2.5) T9(-4.5,-2.5) T10(-3.5,-2.5) T11(-2.5,-2.5) T12(-1.5,-2.5) T13(-0.5,-2.5) T14(0.5,-2.5) T15(1.5,-2.5) T16(2.5,-2.5) T17(3.5,-2.5) T18(4.5,-2.5) T19(5.5,-2.5) T20(6.5,-2.5) T21(7.5,-2.5) T22(8.5,-2.5) T23(9.5,-2.5) T24(10.5,-2.5) T25(11.5,-2.5) T26(12.5,-2.5) U1(-12.5,-3.5) U2(-11.5,-3.5) U3(-10.5,-3.5) U4(-9.5,-3.5) U5(-8.5,-3.5) U6(-7.5,-3.5) U7(-6.5,-3.5) U8(-5.5,-3.5) U9(-4.5,-3.5) U10(-3.5,-3.5) U11(-2.5,-3.5) U12(-1.5,-3.5) U13(-0.5,-3.5) U14(0.5,-3.5) U15(1.5,-3.5) U16(2.5,-3.5) U17(3.5,-3.5) U18(4.5,-3.5) U19(5.5,-3.5) U20(6.5,-3.5) U21(7.5,-3.5) U22(8.5,-3.5) U23(9.5,-3.5) U24(10.5,-3.5) U25(11.5,-3.5) U26(12.5,-3.5) V1(-12.5,-4.5) V2(-11.5,-4.5) V3(-10.5,-4.5) V4(-9.5,-4.5) V5(-8.5,-4.5) V6(-7.5,-4.5) V7(-6.5,-4.5) V8(-5.5,-4.5) V9(-4.5,-4.5) V10(-3.5,-4.5) V11(-2.5,-4.5) V12(-1.5,-4.5) V13(-0.5,-4.5) V14(0.5,-4.5) V15(1.5,-4.5) V16(2.5,-4.5) V17(3.5,-4.5) V18(4.5,-4.5) V19(5.5,-4.5) V20(6.5,-4.5) V21(7.5,-4.5) V22(8.5,-4.5) V23(9.5,-4.5) V24(10.5,-4.5) V25(11.5,-4.5) V26(12.5,-4.5) W1(-12.5,-5.5) W2(-11.5,-5.5) W3(-10.5,-5.5) W4(-9.5,-5.5) W5(-8.5,-5.5) W6(-7.5,-5.5) W7(-6.5,-5.5) W8(-5.5,-5.5) W9(-4.5,-5.5) W10(-3.5,-5.5) W11(-2.5,-5.5) W12(-1.5,-5.5) W13(-0.5,-5.5) W14(0.5,-5.5) W15(1.5,-5.5) W16(2.5,-5.5) W17(3.5,-5.5) W18(4.5,-5.5) W19(5.5,-5.5) W20(6.5,-5.5) W21(7.5,-5.5) W22(8.5,-5.5) W23(9.5,-5.5) W24(10.5,-5.5) W25(11.5,-5.5) W26(12.5,-5.5) Y1(-12.5,-6.5) Y2(-11.5,-6.5) Y3(-10.5,-6.5) Y4(-9.5,-6.5) Y5(-8.5,-6.5) Y6(-7.5,-6.5) Y7(-6.5,-6.5) Y8(-5.5,-6.5) Y9(-4.5,-6.5) Y10(-3.5,-6.5) Y11(-2.5,-6.5) Y12(-1.5,-6.5) Y13(-0.5,-6.5) Y14(0.5,-6.5) Y15(1.5,-6.5) Y16(2.5,-6.5) Y17(3.5,-6.5) Y18(4.5,-6.5) Y19(5.5,-6.5) Y20(6.5,-6.5) Y21(7.5,-6.5) Y22(8.5,-6.5) Y23(9.5,-6.5) Y24(10.5,-6.5) Y25(11.5,-6.5) Y26(12.5,-6.5)
  silkscreen extent -14.23,-13.5 13.5,13.5, body extent -13.5,-13.5 13.5,13.5, height 3.5
C60 [mm] "0.6mm Diameter SMD Pad"
  round 0.6 smd paste-1: 1(0,0)
  silkscreen extent -0.65,-0.65 0.65,0.65
C100 [mm] "1mm Diameter SMD Pad"
  round 1 smd paste-0.5: 1(0,0)
CAPAE530X610N [mm] "Capacitor, Aluminium Electrolytric, 5.3mm L X 5.3mm W X 6.1mm H, IPC Medium Density"
  rect 3.3x1.65 smd: 1(-1.9,0) 2(1.9,0)
  silkscreen extent -3.4,-2.76 2.76,2.76, body extent -3.05,-2.76 3.05,2.76, height 6.3
CAPAE830X1020N [mm] "Capacitor, Aluminium Electrolytric, 8.3mm L X 8.3mm W X 10.2mm H, IPC Medium Density"
  rect 4.4x1.8 smd: 1(-3.7,0) 2(3.7,0)
  silkscreen extent -4.9,-4.15 4.15,4.15, body extent -4.75,-4.25 5.25,4.25, height 10.2
CAPC0603X33N [mm] "Chip Capacitor, Body 0.6x0.30mm, IPC Medium Density"
  rect 0.5x0.45 smd paste-0.025 mask-0.025: 1(-0.35,0) 2(0.35,0)
  body extent -0.31,-0.16 0.32,0.17, height 0.33
CAPC1005X55N [mm] "Capacitor, Non-Polarized, Chip; 1.00mm L X 0.50mm W X 0.70mm H, IPC Medium Density"
  rect 0.62x0.62 smd: 1(-0.45,0) 2(0.45,0)
  body extent -0.52,-0.27 0.53,0.28, height 0.55
CAPC1005X61N [mm] "Capacitor, Non-Polarized, Chip; 1.02mm L X 0.51mm W X 0.61mm H, IPC Medium Density"
  rect 0.65x0.65 smd: 1(-0.46,0) 2(0.46,0)
  body extent -0.56,-0.3 0.56,0.31, height 0.61
CAPC1005X70N [mm] "Capacitor, Non-Polarized, Chip; 1.00mm L X 0.50mm W X 0.70mm H, IPC Medium Density"
  rect 0.71x0.72 smd: 1(-0.46,0) 2(0.46,0)
  body extent -0.6,-0.35 0.6,0.35, height 0.7
CAPC1608X87N [mm] "Chip Capacitor, Body 1.6x0.8mm IPC Medium Density"
  rect 0.95x1 smd: 1(-0.8,0) 2(0.8,0)
  body extent -0.87,-0.47 0.88,0.48, height 0.87
CAPC1608X100N [mm] "Capacitor, non-Polarized, Chip; 1.60mm L X 0.80mm W X 1.00mm H, IPC Medium Density"
  rect 0.8x0.95 smd: 1(-0.8,0) 2(0.8,0)
  silkscreen extent 0,-0.3 0,0.3, body extent -0.85,-0.45 0.85,0.45, height 1
CAPC2012X88N [mm] "Chip Capacitor, Body 2.0x1.25mm, IPC Medium Density"
  rect 1.15x1.45 smd: 1(-0.9,0) 2(0.9,0)
  silkscreen extent 0,-0.57 0,0.57, body extent -1.05,-0.67 1.05,0.68, height 0.9
CAPC2012X135N [mm] "Chip Capacitor, Body 2.0x1.25mm, IPC Medium Density"
  rect 1.05x1.4 smd: 1(-0.9,0) 2(0.9,0)
  silkscreen extent 0,-0.57 0,0.57, body extent -1.05,-0.67 1.05,0.68, height 1.25
CAPC2012X140N [mm] "Chip Capacitor, Body 2.0x1.25mm, IPC Medium Density"
  rect 1.15x1.45 smd: 1(-0.9,0) 2(0.9,0)
  silkscreen extent 0,-0.58 0,0.58, body extent -1.05,-0.67 1.05,0.68, height 1.3
CAPC2013X100N [mm] "Capacitor, Non-Polarized, Chip; 2.00mm L X 1.25mm W X 0.9mm H, IPC Medium Density"
  rect 1.15x1.45 smd: 1(-0.9,0) 2(0.9,0)
  silkscreen extent 0,-0.63 0,0.63, body extent -1.1,-0.72 1.1,0.73, height 1
CAPC2013X145N [mm] "Capacitor, Non-Polarized, Chip; 2.00mm L X 1.25mm W X 1.45mm H, IPC Medium Density"
  rect 1.15x1.45 smd: 1(-0.9,0) 2(0.9,0)
  silkscreen extent 0,-0.63 0,0.63, body extent -1.1,-0.72 1.1,0.73, height 1.45
CAPC3216X180N [mm] "Chip Capacitor, Body 3.2x1.6mm, IPC Medium Density"
  rect 1.15x1.8 smd: 1(-1.5,0) 2(1.5,0)
  silkscreen extent -0.55,-0.8 0.55,0.8, body extent -1.7,-0.9 1.7,0.9, height 1.8
CAPC3225X270N [mm] "Chip Capacitor, Body 3.2x2.5mm, IPC Medium Density"
  rect 1.15x2.7 smd: 1(-1.5,0) 2(1.5,0)
  silkscreen extent -0.55,-1.25 0.55,1.25, body extent -1.7,-1.35 1.7,1.35, height 2.7
CAPMP3216X180N [mm] "Capacitor, Polarized, Molded  Body 3.2x1.6mm, IPC Medium Density"
  rect 1.8x1.25 smd: 1(-1.3,0) 2(1.3,0)
  silkscreen extent -2.4,-0.7 0,1.25, body extent -1.7,-0.9 1.7,0.9, height 1.6
CAPMP3528X120N [mm] "Capacitor, Polarized, Molded  Body 3.5x2.8mm, IPC Medium Density"
  rect 1.8x2.25 smd: 1(-1.45,0) 2(1.45,0)
  silkscreen extent -2.52,-1.5 1.85,1.72, body extent -1.85,-1.5 1.85,1.5, height 1.2
CAPMP3528X210N [mm] "Capacitor, Polarized, Molded  Body 3.5x2.8mm, IPC Medium Density"
  rect 1.8x2.25 smd: 1(-1.45,0) 2(1.45,0)
  silkscreen extent -2.52,-1.5 1.85,1.73, body extent -1.85,-1.5 1.85,1.5, height 2.1
CONNFLY_DS1013-06SSIB1-B-0 [mm] "Part Description / 6 Contacts, 2.54mm Box Header V/T,R/A & SMT Type"
  round 1.7 hole 1: 1(-2.54,-1.27) 2(-2.54,1.27) 3(0,-1.27) 4(0,1.27) 5(2.54,-1.27) 6(2.54,1.27)
  silkscreen extent -7.61,-4.55 7.61,4.55, body extent -7.61,-4.55 7.61,4.55, height 9.1
CONNFLY_DS1013-40SSIB1-B-0 [mm] "40 Contacts, 2.54mm Box Header V/T,R/A & SMT Type"
  round 1.7 hole 1: 1(-24.13,-1.27) 2(-24.13,1.27) 3(-21.59,-1.27) 4(-21.59,1.27) 5(-19.05,-1.27) 6(-19.05,1.27) 7(-16.51,-1.27) 8(-16.51,1.27) 9(-13.97,-1.27) 10(-13.97,1.27) 11(-11.43,-1.27) 12(-11.43,1.27) 13(-8.89,-1.27) 14(-8.89,1.27) 15(-6.35,-1.27) 16(-6.35,1.27) 17(-3.81,-1.27) 18(-3.81,1.27) 19(-1.27,-1.27) 20(-1.27,1.27) 21(1.27,-1.27) 22(1.27,1.27) 23(3.81,-1.27) 24(3.81,1.27) 25(6.35,-1.27) 26(6.35,1.27) 27(8.89,-1.27) 28(8.89,1.27) 29(11.43,-1.27) 30(11.43,1.27) 31(13.97,-1.27) 32(13.97,1.27) 33(16.51,-1.27) 34(16.51,1.27) 35(19.05,-1.27) 36(19.05,1.27) 37(21.59,-1.27) 38(21.59,1.27) 39(24.13,-1.27) 40(24.13,1.27)
  silkscreen extent -29.2,-4.55 29.2,4.55, body extent -29.2,-4.55 29.2,4.55, height 9.1
DBT0038A_M [mm] "SOP, 38-Leads, Body 9.8x4.5mm, Pitch 0.5mm, IPC Low Density"
  rrect33% 1.6x0.3 smd: 1(-3.05,4.5) 2(-3.05,4) 3(-3.05,3.5) 4(-3.05,3) 5(-3.05,2.5) 6(-3.05,2) 7(-3.05,1.5) 8(-3.05,1) 9(-3.05,0.5) 10(-3.05,0) 11(-3.05,-0.5) 12(-3.05,-1) 13(-3.05,-1.5) 14(-3.05,-2) 15(-3.05,-2.5) 16(-3.05,-3) 17(-3.05,-3.5) 18(-3.05,-4) 19(-3.05,-4.5) 20(3.05,-4.5) 21(3.05,-4) 22(3.05,-3.5) 23(3.05,-3) 24(3.05,-2.5) 25(3.05,-2) 26(3.05,-1.5) 27(3.05,-1) 28(3.05,-0.5) 29(3.05,0) 30(3.05,0.5) 31(3.05,1) 32(3.05,1.5) 33(3.05,2) 34(3.05,2.5) 35(3.05,3) 36(3.05,3.5) 37(3.05,4) 38(3.05,4.5)
  silkscreen extent -3.17,-4.9 1.85,5.35, body extent -3.21,-4.85 3.21,4.85, height 1.2
HIROSE_U.FL-R-SMT-1 [mm] "Up to 6GHz Ultra Small Surface Mount Male Coaxial Connectors U.FL Series"
  rect 1x1.05 smd: 1(0,-1.525)
  rect 1.05x2.2 smd: 2(-1.475,0) 2(1.475,0)
  Top Layer keep-out lines w0.1: -0.6,-0.65 -0.6,0 cw(c0,0) 0.6,0 0.6,-0.65 -0.6,-0.65
  silkscreen extent -0.7,-0.69 0.7,1.55, body extent -1.5,-1.55 1.5,1.55, height 1.25
HSINK_WAKEFIELD_960-29-18-D-AB-0 [mm] "Extruded Heat Sink for PCB Mounting With Plastic Push Pin - L 30mm X W 29.5mm H 18mm"
  round 1 hole 3.2 unplated mask+1.1: 1(-17.925,17.925) 1(17.925,-17.925)
  silkscreen extent -21.35,-21.35 21.35,21.35, body extent -21.35,-21.35 21.35,21.35, height 22
IND_VISHAY_IHPL4040DZ-01 [mm] "Inductor, Molded Body; 10.795mm L X 10.16mm W X 4.00mm H"
  rect 3.124x3.251 smd: 1(-4.47,0) 2(4.47,0)
  silkscreen extent -5.28,-5.08 5.28,5.08, body extent -5.28,-5.08 5.28,5.08, height 3.83
INDC1608X95N [mm] "Chip Inductor, 2-Leads, EIA 0603, Metric 1608, Body 1.6x0.8mm, IPC Medium Density"
  rect 0.95x1 smd: 1(-0.8,0) 2(0.8,0)
  body extent -0.87,-0.47 0.88,0.48, height 0.95
INDC2012X105N#1 [mm] "Chip Inductor, EIA 0805, Metric 2012, Body 2.0x1.25mm, IPC Medium Density"
  rect 1.15x1.45 smd: 1(-0.9,0) 2(0.9,0)
  silkscreen extent 0,-0.6 0,0.6, body extent -1.1,-0.7 1.1,0.7, height 1.1
INDC2012X105N#2 [mm] "Chip Inductor, EIA 0805, Metric 2012, Body 2.0x1.25mm, IPC Medium Density"
  rect 1x1.45 smd: 1(-0.9,0) 2(0.9,0)
  silkscreen extent 0,-0.6 0,0.6, body extent -1.1,-0.7 1.1,0.7, height 1.1
jump [mm]
  rect 1.5x1.5 hole 0.965: 1(0,0)
  round 1.5 hole 0.965: 2(0,-2.54)
  silkscreen extent -1.2,-3.81 1.2,1.27, body extent -1.26,-3.84 1.19,1.24, height 8
LED_KINGBRIGHT_KPH-1608CGCK [mm] "SMT Green LED, Case 0603, Body L 1.6 x W 0.8mm H 0.65mm"
  rect 0.8x0.8 smd: 1(-0.825,0) 2(0.825,0)
  silkscreen extent -1.82,-0.4 0.08,0.4, body extent -0.8,-0.4 0.8,0.4, height 0.65
LED_KINGBRIGHT_KPH-1608SURCK [mm] "SMT Hyper Red LED, Case 0603, Body L 1.6 x W 0.8mm H 0.65mm"
  rect 0.8x0.8 smd: 1(-0.825,0) 2(0.825,0)
  silkscreen extent -1.82,-0.4 0.08,0.4, body extent -0.8,-0.4 0.8,0.4, height 0.65
LED_KINGBRIGHT_KPT-2012SURCK [mm] "Red SMD LED, Case 2012, Body L 2.00mm X  W 1.25mm X H 0.75mm"
  rect 1.25x1.1 smd: 1(-1.175,0) 2(1.175,0)
  silkscreen extent -2.35,-0.63 0.2,0.63, body extent -1,-0.62 1,0.63, height 0.75
"LED_OSRAM_LB Q39G" [mm] "Chip Blue LED, 2-Leads, Body 1.6x0.8mm"
  rect 0.5x0.8 smd: 1(-0.875,0) 2(0.875,0)
  silkscreen extent -1.88,-0.65 0.28,0.65, body extent -0.8,-0.4 0.8,0.4, height 0.35
LEMO_EPG.00.302.NLN [mm] "Multipole 2 Contacts, 50 Ohm size 00 Coaxial Elbow (90°) Socket With Key"
  rrect50% 1.1x1.1 hole 0.6 copper offset -0.05,0: 1(-0.635,0)
  rrect50% 1.1x1.1 hole 0.6 copper offset 0.05,0: 2(0.635,0)
  round 1.6 hole 0.9: 3(-2.54,-2.54) 3(-2.54,2.54) 3(2.54,-2.54) 3(2.54,2.54)
  silkscreen extent -3.5,-3.5 14,3.5, body extent -3.5,-3.5 14,3.5, height 7
MOLEX_15-24-9067 [mm] "Mini-Fit BMI Header, Dual Row, Right-Angle, with Snap-in Plastic Peg PCB Lock, 6 Circuits, Gold (Au) Plating"
  round 2.5 hole 1.8: 1(-4.2,2.75) 2(0,2.75) 3(4.2,2.75) 4(-4.2,-2.75) 5(0,-2.75) 6(4.2,-2.75)
  round 1 hole 3 unplated mask+1: MECH1(-4.2,10.05) MECH2(4.2,10.05)
  silkscreen extent -9.6,-1.24 9.6,17.95, body extent -9.6,-3.27 9.6,17.95, height 15
MOLEX_87832-1420 [mm] "Milli-Grid, Pitch 2mm, 14 contacts, Surface Mount Vertical Header With Locking Window And Centre Polarization Slot"
  rect 1x2.75 smd: 1(-6,-2.125) 2(-6,2.125) 3(-4,-2.125) 4(-4,2.125) 5(-2,-2.125) 6(-2,2.125) 7(0,-2.125) 8(0,2.125) 9(2,-2.125) 10(2,2.125) 11(4,-2.125) 12(4,2.125) 13(6,-2.125) 14(6,2.125)
  round 0.5 hole 1 unplated mask+0.25: 15(-5,0) 16(5,0)
  silkscreen extent -8.32,-4.23 8.32,3.15, body extent -8.32,-3.15 8.33,3.15, height 7.6
MPS_MPM54304GMN [mm] "MPS LGA-33 Case, 0.65mm Pitch, Rect. ; 32 Pin, 7.00mm L X 7.00mm W X 2.10mm H body (w/Thermal Tab 3.55 X 3.55mm)"
  rect 0.975x0.35 smd paste-2539.97 mask-0.025: 1(-2.963,1.633) 2(-2.963,0.983) 3(-2.963,0.325) 4(-2.963,-0.313) 5(-2.963,-0.983) 6(-2.963,-1.633) 17(2.963,-1.633) 18(2.963,-0.975) 19(2.963,-0.325) 20(2.963,0.325) 21(2.963,0.983) 22(2.963,1.633)
  rect 0.35x0.975 smd paste-2539.97 mask-0.025: 7(-2.925,-2.963) 8(-2.275,-2.963) 9(-1.625,-2.963) 10(-0.975,-2.963) 11(-0.325,-2.963) 12(0.325,-2.963) 13(0.975,-2.963) 14(1.625,-2.963) 15(2.275,-2.963) 16(2.925,-2.963) 23(2.925,2.963) 24(2.275,2.963) 25(1.625,2.963) 26(0.975,2.963) 27(0.325,2.963) 28(-0.325,2.963) 29(-0.975,2.963) 30(-1.625,2.963) 31(-2.275,2.963) 32(-2.925,2.963)
  rect 3.6x3.6 smd paste-2539.97 mask-0.25: 33(0,0)
  silkscreen extent -4.15,-3.5 3.5,3.5, body extent -3.5,-3.5 3.5,3.5, height 2.1
OSC_ECS_ECS-3518 [mm] "SMD Oscillator, 4 pins, 5 x 3.2mm, 3518 Series"
  rect 1.5x1.6 smd: 1(-1.15,1.25) 2(-1.15,-1.25) 3(1.15,-1.25) 4(1.15,1.25)
  silkscreen extent -2.67,-2.6 1.65,2.6, body extent -1.65,-2.6 1.65,2.6, height 1.3
OSC_IQD_CFPS-73 [mm] "Oscillator, Side Concave, 5.08mm Pitch, 4 Pins, 5.00mm L X 7.00mm W X 1.40mm H, CFPS-73 Series"
  rect 1.6x1.8 smd: 1(-2.1,2.54) 2(-2.1,-2.54) 3(2.1,-2.54) 4(2.1,2.54)
  silkscreen extent -3.58,-3.6 2.6,3.6, body extent -2.6,-3.6 2.6,3.6, height 1.4
PB_OMRON_B3U-1100P [mm] "Body 1.2x3x2.5mm Ultra-Small Tactile Pushbutton Switch, (with Ground Terminal), OMRON B3U Series"
  rect 0.8x1.7 smd: 1(-1.7,0) 2(1.7,0)
  rect 0.8x1.1 smd: 3(0,-1.65)
  silkscreen extent -1.5,-1.25 1.5,1.25, body extent -2,-1.95 2,1.25, height 1.75
QFN50P700X700X80-49N-S290 [mm] "QFN, 0.50mm Pitch, Square; 48 Pin, 7.00mm L X 7.00mm W X 0.80mm H body (W/Thermal Tab 2.9mm X 2.9mm), IPC Medium Density"
  rect 0.7x0.3 smd: 1(-3.48,2.75) 2(-3.48,2.25) 3(-3.48,1.75) 4(-3.48,1.25) 5(-3.48,0.75) 6(-3.48,0.25) 7(-3.48,-0.25) 8(-3.48,-0.75) 9(-3.48,-1.25) 10(-3.48,-1.75) 11(-3.48,-2.25) 12(-3.48,-2.75) 25(3.48,-2.75) 26(3.48,-2.25) 27(3.48,-1.75) 28(3.48,-1.25) 29(3.48,-0.75) 30(3.48,-0.25) 31(3.48,0.25) 32(3.48,0.75) 33(3.48,1.25) 34(3.48,1.75) 35(3.48,2.25) 36(3.48,2.75)
  rect 0.3x0.7 smd: 13(-2.75,-3.48) 14(-2.25,-3.48) 15(-1.75,-3.48) 16(-1.25,-3.48) 17(-0.75,-3.48) 18(-0.25,-3.48) 19(0.25,-3.48) 20(0.75,-3.48) 21(1.25,-3.48) 22(1.75,-3.48) 23(2.25,-3.48) 24(2.75,-3.48) 37(2.75,3.48) 38(2.25,3.48) 39(1.75,3.48) 40(1.25,3.48) 41(0.75,3.48) 42(0.25,3.48) 43(-0.25,3.48) 44(-0.75,3.48) 45(-1.25,3.48) 46(-1.75,3.48) 47(-2.25,3.48) 48(-2.75,3.48)
  rect 2.9x2.9 smd: 49(0,0)
  silkscreen extent -4.36,-3.5 3.5,3.5, body extent -3.5,-3.5 3.5,3.5, height 0.8
QFN50P700X700X100-49N-S570 [mm] "QFN, 0.50mm Pitch, Square; 48 Pin, 7.00mm L X 7.00mm W X 1mm H body (W/Thermal Tab 5.7mm X 5.7mm), IPC Medium Density"
  oval 0.85x0.3 smd: 1(-3.5,2.75) 2(-3.5,2.25) 3(-3.5,1.75) 4(-3.5,1.25) 5(-3.5,0.75) 6(-3.5,0.25) 7(-3.5,-0.25) 8(-3.5,-0.75) 9(-3.5,-1.25) 10(-3.5,-1.75) 11(-3.5,-2.25) 12(-3.5,-2.75) 25(3.5,-2.75) 26(3.5,-2.25) 27(3.5,-1.75) 28(3.5,-1.25) 29(3.5,-0.75) 30(3.5,-0.25) 31(3.5,0.25) 32(3.5,0.75) 33(3.5,1.25) 34(3.5,1.75) 35(3.5,2.25) 36(3.5,2.75)
  oval 0.3x0.85 smd: 13(-2.75,-3.5) 14(-2.25,-3.5) 15(-1.75,-3.5) 16(-1.25,-3.5) 17(-0.75,-3.5) 18(-0.25,-3.5) 19(0.25,-3.5) 20(0.75,-3.5) 21(1.25,-3.5) 22(1.75,-3.5) 23(2.25,-3.5) 24(2.75,-3.5) 37(2.75,3.5) 38(2.25,3.5) 39(1.75,3.5) 40(1.25,3.5) 41(0.75,3.5) 42(0.25,3.5) 43(-0.25,3.5) 44(-0.75,3.5) 45(-1.25,3.5) 46(-1.75,3.5) 47(-2.25,3.5) 48(-2.75,3.5)
  rect 5.7x5.7 smd: 49(0,0)
  silkscreen extent -4.63,-3.5 3.5,3.5, body extent -3.5,-3.5 3.5,3.5, height 1
QFN50P900X900X100-65N-S750 [mm] "QFN, 0.50mm Pitch, Square; 64 Pin, 9.00mm L X 9.00mm W X 1.00mm H Body (7.5 X 7.5mm Thermal Tab), IPC Medium Density"
  oval 0.9x0.3 smd: 1(-4.45,3.75) 2(-4.45,3.25) 3(-4.45,2.75) 4(-4.45,2.25) 5(-4.45,1.75) 6(-4.45,1.25) 7(-4.45,0.75) 8(-4.45,0.25) 9(-4.45,-0.25) 10(-4.45,-0.75) 11(-4.45,-1.25) 12(-4.45,-1.75) 13(-4.45,-2.25) 14(-4.45,-2.75) 15(-4.45,-3.25) 16(-4.45,-3.75) 33(4.45,-3.75) 34(4.45,-3.25) 35(4.45,-2.75) 36(4.45,-2.25) 37(4.45,-1.75) 38(4.45,-1.25) 39(4.45,-0.75) 40(4.45,-0.25) 41(4.45,0.25) 42(4.45,0.75) 43(4.45,1.25) 44(4.45,1.75) 45(4.45,2.25) 46(4.45,2.75) 47(4.45,3.25) 48(4.45,3.75)
  oval 0.3x0.9 smd: 17(-3.75,-4.45) 18(-3.25,-4.45) 19(-2.75,-4.45) 20(-2.25,-4.45) 21(-1.75,-4.45) 22(-1.25,-4.45) 23(-0.75,-4.45) 24(-0.25,-4.45) 25(0.25,-4.45) 26(0.75,-4.45) 27(1.25,-4.45) 28(1.75,-4.45) 29(2.25,-4.45) 30(2.75,-4.45) 31(3.25,-4.45) 32(3.75,-4.45) 49(3.75,4.45) 50(3.25,4.45) 51(2.75,4.45) 52(2.25,4.45) 53(1.75,4.45) 54(1.25,4.45) 55(0.75,4.45) 56(0.25,4.45) 57(-0.25,4.45) 58(-0.75,4.45) 59(-1.25,4.45) 60(-1.75,4.45) 61(-2.25,4.45) 62(-2.75,4.45) 63(-3.25,4.45) 64(-3.75,4.45)
  rect 7.5x7.5 smd: 65(0,0)
  silkscreen extent -5.62,-4.5 4.5,4.5, body extent -4.5,-4.5 4.5,4.5, height 1
QFN65P400X400X80-17N-S240 [mm] "QFN, 0.65mm Pitch, Square; 16 Pin, 4.00mm L X 4.00mm W X 0.80mm H Body (w/Thermal tab 2.4 X 2.4mm),  IPC Medium Density"
  rrect100% 0.85x0.35 smd: 1(-1.95,0.975) 2(-1.95,0.325) 3(-1.95,-0.325) 4(-1.95,-0.975) 9(1.95,-0.975) 10(1.95,-0.325) 11(1.95,0.325) 12(1.95,0.975)
  rrect100% 0.35x0.85 smd: 5(-0.975,-1.95) 6(-0.325,-1.95) 7(0.325,-1.95) 8(0.975,-1.95) 13(0.975,1.95) 14(0.325,1.95) 15(-0.325,1.95) 16(-0.975,1.95)
  rect 2.4x2.4 smd: 17(0,0)
  silkscreen extent -3.07,-2 2,2, body extent -2,-2 2,2, height 0.8
QFP80P1600X1600X120-64N [mm] "QFP, 0.80mm Pitch, Square; 64 Pin, 14.00mm L X 14.00mm W X 1.20mm H Body, IPC Medium Density"
  rect 1.5x0.55 smd: 1(-7.7,6) 2(-7.7,5.2) 3(-7.7,4.4) 4(-7.7,3.6) 5(-7.7,2.8) 6(-7.7,2) 7(-7.7,1.2) 8(-7.7,0.4) 9(-7.7,-0.4) 10(-7.7,-1.2) 11(-7.7,-2) 12(-7.7,-2.8) 13(-7.7,-3.6) 14(-7.7,-4.4) 15(-7.7,-5.2) 16(-7.7,-6) 33(7.7,-6) 34(7.7,-5.2) 35(7.7,-4.4) 36(7.7,-3.6) 37(7.7,-2.8) 38(7.7,-2) 39(7.7,-1.2) 40(7.7,-0.4) 41(7.7,0.4) 42(7.7,1.2) 43(7.7,2) 44(7.7,2.8) 45(7.7,3.6) 46(7.7,4.4) 47(7.7,5.2) 48(7.7,6)
  rect 0.55x1.5 smd: 17(-6,-7.7) 18(-5.2,-7.7) 19(-4.4,-7.7) 20(-3.6,-7.7) 21(-2.8,-7.7) 22(-2,-7.7) 23(-1.2,-7.7) 24(-0.4,-7.7) 25(0.4,-7.7) 26(1.2,-7.7) 27(2,-7.7) 28(2.8,-7.7) 29(3.6,-7.7) 30(4.4,-7.7) 31(5.2,-7.7) 32(6,-7.7) 49(6,7.7) 50(5.2,7.7) 51(4.4,7.7) 52(3.6,7.7) 53(2.8,7.7) 54(2,7.7) 55(1.2,7.7) 56(0.4,7.7) 57(-0.4,7.7) 58(-1.2,7.7) 59(-2,7.7) 60(-2.8,7.7) 61(-3.6,7.7) 62(-4.4,7.7) 63(-5.2,7.7) 64(-6,7.7)
  silkscreen extent -8.32,-6.6 6.6,6.93, body extent -8.02,-8.02 8.02,8.02, height 1.2
RES_VISHAY_FCHP0402 [mm] "Chip Resistor, EIA 0402, Metric 1005, Resistor,Chip; 1.067mm L X 0.559mm W X 0.381mm H"
  rect 0.7x0.7 smd mask+0: 1(-0.52,0) 2(0.52,0)
  body extent -0.53,-0.28 0.53,0.28, height 0.38
RESC1005X40N [mm] "Chip Resistor, EIA 0402, Metric 1005, Body 1.0x0.5mm, IPC Medium Density"
  rect 0.58x0.62 smd: 1(-0.47,0) 2(0.47,0)
  body extent -0.52,-0.27 0.53,0.28, height 0.4
RESC1608X55N [mm] "Chip Resistor, EIA 0603, Metric 1608, Body 1.6x0.8mm, IPC Medium Density"
  rect 0.9x1 smd: 1(-0.8,0) 2(0.8,0)
  body extent -0.87,-0.47 0.88,0.48, height 0.55
RESC1608X64N [mm] "Chip Resistor, EIA 0603, Metric 1608, Body 1.6x0.8mm, IPC Medium Density"
  rect 0.85x1 smd: 1(-0.8,0) 2(0.8,0)
  body extent -0.87,-0.47 0.88,0.48, height 0.64
RESC2012X60N [mm] "Chip Resistor, EIA 0805, Metric 2012, Body 2.0x1.2mm, IPC Medium Density"
  rect 0.95x1.4 smd: 1(-1,0) 2(1,0)
  silkscreen extent 0,-0.55 0,0.55, body extent -1.1,-0.67 1.1,0.68, height 0.6
RESC5025X65N [mm] "Resistor, Chip; 5mm L X 2.5mm W X 0.65mm H, IPC Medium Density"
  rect 1.15x2.7 smd: 1(-2.35,0) 2(2.35,0)
  silkscreen extent -1.4,-1.25 1.4,1.25, body extent -2.55,-1.32 2.55,1.33, height 0.65
SAMTEC_DW-03-09-L-S-470 [mm] "3 Contacts, Pitch 2.54mm, Single Row Straight .Flex Stack, Flexible Board Stacker (Stacker Height = 11,938mm)"
  rect 1.7x1.7 hole 1: 1(-2.54,0)
  round 1.7 hole 1: 2(0,0) 3(2.54,0)
  silkscreen extent -3.81,-2.01 3.81,1.27, body extent -3.81,-1.27 3.81,1.27, height 15.75
SAMTEC_DW-07-09-L-S-470 [mm] "7 Contacts, Pitch 2.54mm, Single Row Straight .Flex Stack, Flexible Board Stacker (Stacker Height = 11,938mm)"
  rect 1.7x1.7 hole 1: 1(-7.62,0)
  round 1.7 hole 1: 2(-5.08,0) 3(-2.54,0) 4(0,0) 5(2.54,0) 6(5.08,0) 7(7.62,0)
  silkscreen extent -8.89,-2.01 8.89,1.27, body extent -8.89,-1.27 8.89,1.27, height 15.75
SAMTEC_DW-08-09-L-S-470 [mm] "8 Contacts, Pitch 2.54mm, Single Row Straight .Flex Stack, Flexible Board Stacker (Stacker Height = 11,938mm)"
  rect 1.7x1.7 hole 1: 1(-8.89,0)
  round 1.7 hole 1: 2(-6.35,0) 3(-3.81,0) 4(-1.27,0) 5(1.27,0) 6(3.81,0) 7(6.35,0) 8(8.89,0)
  silkscreen extent -10.16,-2.01 10.16,1.27, body extent -10.16,-1.27 10.16,1.27, height 15.75
SAMTEC_DW-12-09-L-S-470 [mm] "12 Contacts, Pitch 2.54mm, Single Row Straight,Flexible Board Stacker (Stacker Height = 11,938mm)"
  rect 1.7x1.7 hole 1: 1(-13.97,0)
  round 1.7 hole 1: 2(-11.43,0) 3(-8.89,0) 4(-6.35,0) 5(-3.81,0) 6(-1.27,0) 7(1.27,0) 8(3.81,0) 9(6.35,0) 10(8.89,0) 11(11.43,0) 12(13.97,0)
  silkscreen extent -15.24,-2.01 15.24,1.27, body extent -15.24,-1.27 15.24,1.27, height 15.75